# Altium PCB ALU_Shifter.PcbDoc
Units mil, origin at the board's own origin, x right, y up, seen from the top; angles counter-clockwise.
Board outline 3500 x 2500 mil, 2 copper layers (Top Layer, Bottom Layer); 17 components, 106 nets, 284 pads, 0 vias.
Unrouted connection lines stored in the file: 163.
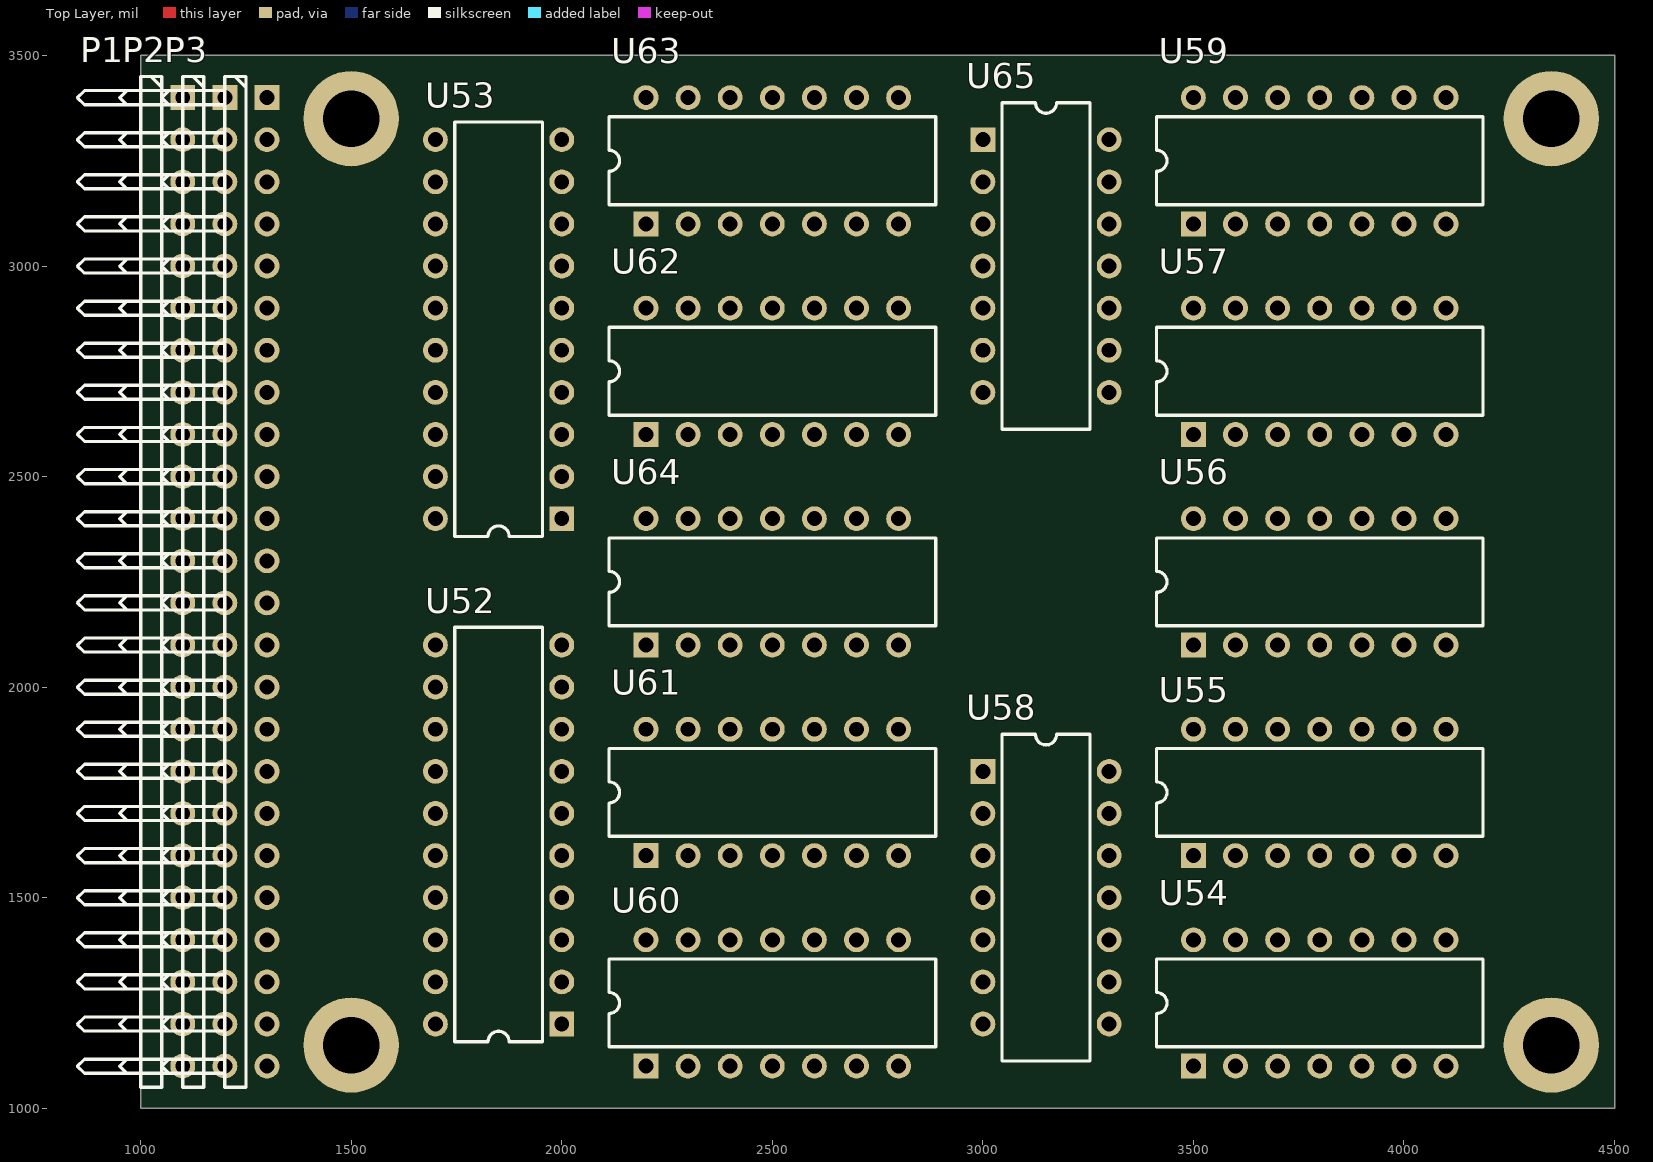
[diagram p0: Top Layer view]
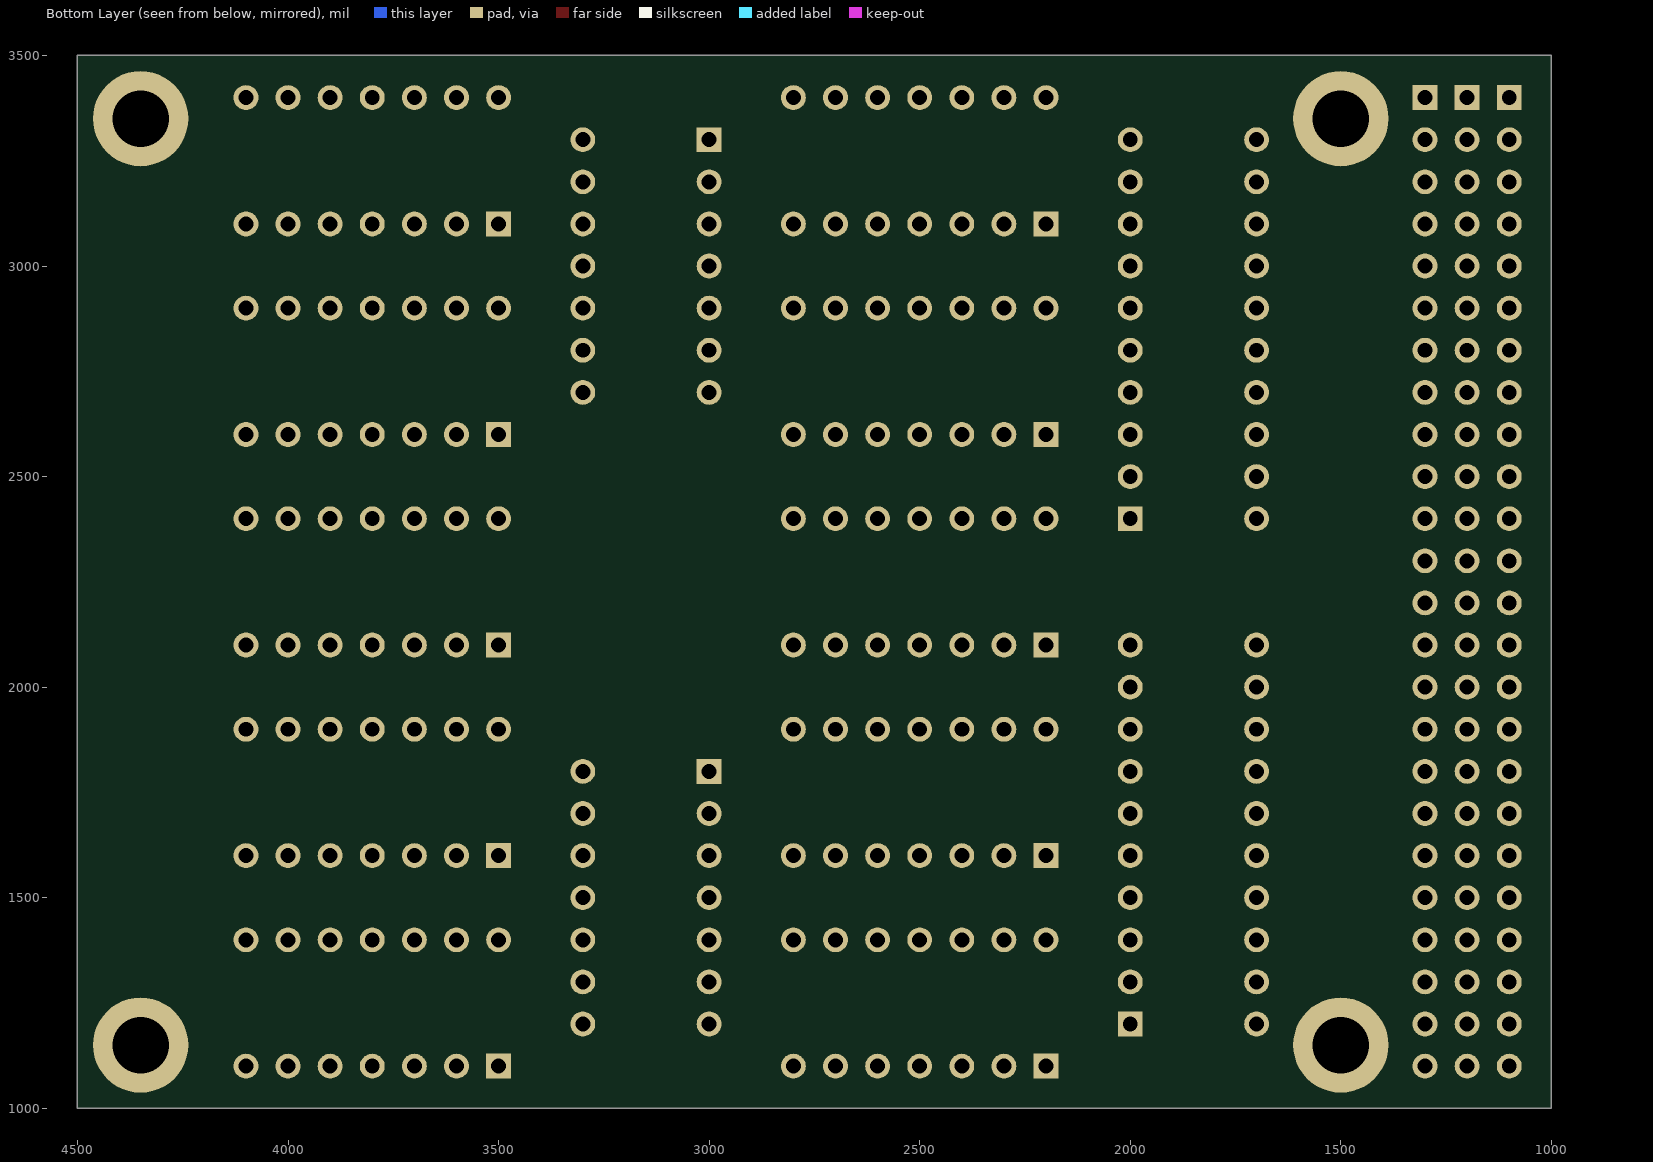
[diagram p1: Bottom Layer view, seen from below]

## Layer stack, top to bottom
Top Solder: solder mask 0.4, Solder Resist, Dk 3.5
Top Layer: signal copper 1.4
Dielectric 1: dielectric 12.6, FR-4, Dk 4.8
Bottom Layer: signal copper 1.4
Bottom Solder: solder mask 0.4, Solder Resist, Dk 3.5

## Board outline
1000,1000 4500,1000 4500,3500 1000,3500

## Design rules (kind name [scope] priority, off if disabled: settings)
Clearance [All] p1: gap=10 ignorepadtopadclearanceinfootprint=FALSE except(0: Arc-Hole Track-Hole SMDPad-Hole THPad-Hole Via-Hole Fill-Hole Poly-Hole Region-Hole Text-Hole)
PolygonConnect [All] p1: connectstyle=Relief reliefconductorwidth=10 reliefentries=4 polygonreliefangle="90 Angle" airgapwidth=10
RoutingVias [All] p1: holewidth=28 width=50 viastyle="Through Hole" minholewidth=28 minwidth=50 maxholewidth=28 maxwidth=50
SolderMaskExpansion [All] p1: expansion=4 istentingtop=FALSE
Width [All] p1: maxlimit=10 minlimit=10 preferedwidth=10
30 further rules are at their usual default settings.

## Classes and differential pairs
component class ALU_SHIFTER: U52 U53 U54 U55 U56 U57 U58 U59 U60 U61 U62 U63 U64 U65
component class Connectors: P1 P2 P3
net class OUT_[15..0]: OUT_0 OUT_1 OUT_2 OUT_3 OUT_4 OUT_5 OUT_6 OUT_7 OUT_8 OUT_9 OUT_10 OUT_11 OUT_12 OUT_13 OUT_14 OUT_15
net class B_[15..0]: B_0 B_1 B_2 B_3 B_4 B_5 B_6 B_7 B_8 B_9 B_10 B_11 B_12 B_13 B_14 B_15
net class A_[15..0]: A_0 A_1 A_2 A_3 A_4 A_5 A_6 A_7 A_8 A_9 A_10 A_11 A_12 A_13 A_14 A_15

## Components (designator, comment, footprint, x,y, rotation, side; value= is the part's Value field where it differs from the comment)
P1 "Header 24H" HDR1X24H 1100,3400 r270 top
P2 "Header 24H" HDR1X24H 1200,3400 r270 top
P3 "Header 24H" HDR1X24H 1300,3400 r270 top
U52 "SN74LS245N" N020 1850,1650 r90 top
U53 "SN74LS245N" N020 1850,2850 r90 top
U54 "SN74LS08N" N014 3800,1250 r0 top
U55 "SN74LS08N" N014 3800,1750 r0 top
U56 "SN74LS08N" N014 3800,2250 r0 top
U57 "SN74LS08N" N014 3800,2750 r0 top
U58 "SN74LS32N" N014 3150,1500 r270 top
U59 "SN74LS32N" N014 3800,3250 r0 top
U60 "SN74LS08N" N014 2500,1250 r0 top
U61 "SN74LS08N" N014 2500,1750 r0 top
U62 "SN74LS08N" N014 2500,2750 r0 top
U63 "SN74LS08N" N014 2500,3250 r0 top
U64 "SN74LS32N" N014 2500,2250 r0 top
U65 "SN74LS32N" N014 3150,3000 r270 top

## Footprints (in the part's own frame and the unit in brackets; to place one, negate y for a bottom-side part, rotate by r counter-clockwise, add the part's x,y. Pads: shape width x height; smd on the part's side, far side on the other; paste and mask are expansions set on the pad)
HDR1X24H [mm] "Connector; Header; 24 Position; Right Angle"
  rect 1.5x1.5 hole 0.9: 1(0,0)
  round 1.5 hole 0.9: 2(2.54,0) 3(5.08,0) 4(7.62,0) 5(10.16,0) 6(12.7,0) 7(15.24,0) 8(17.78,0) 9(20.32,0) 10(22.86,0) 11(25.4,0) 12(27.94,0) 13(30.48,0) 14(33.02,0) 15(35.56,0) 16(38.1,0) 17(40.64,0) 18(43.18,0) 19(45.72,0) 20(48.26,0) 21(50.8,0) 22(53.34,0) 23(55.88,0) 24(58.42,0)
  silkscreen extent -1.27,-6.35 59.69,-1.27
N014 [mm] "DIP; 14 Leads; Row Spacing 7.62 mm; Pitch 2.54 mm"
  rect 1.5x1.5 hole 0.9: 1(-7.62,-3.81)
  round 1.5 hole 0.9: 2(-5.08,-3.81) 3(-2.54,-3.81) 4(0,-3.81) 5(2.54,-3.81) 6(5.08,-3.81) 7(7.62,-3.81) 8(7.62,3.81) 9(5.08,3.81) 10(2.54,3.81) 11(0,3.81) 12(-2.54,3.81) 13(-5.08,3.81) 14(-7.62,3.81)
  silkscreen extent -9.85,-2.65 9.85,2.65, body extent -9.15,-5.08 9.15,5.12, height 7.88
N020 [mm] "DIP; 20 Leads; Row Spacing 7.62 mm; Pitch 2.54 mm"
  rect 1.5x1.5 hole 0.9: 1(-11.43,-3.81)
  round 1.5 hole 0.9: 2(-8.89,-3.81) 3(-6.35,-3.81) 4(-3.81,-3.81) 5(-1.27,-3.81) 6(1.27,-3.81) 7(3.81,-3.81) 8(6.35,-3.81) 9(8.89,-3.81) 10(11.43,-3.81) 11(11.43,3.81) 12(8.89,3.81) 13(6.35,3.81) 14(3.81,3.81) 15(1.27,3.81) 16(-1.27,3.81) 17(-3.81,3.81) 18(-6.35,3.81) 19(-8.89,3.81) 20(-11.43,3.81)
  silkscreen extent -12.5,-2.65 12.5,2.65, body extent -13.08,-5.08 13.08,5.12, height 7.88

## Part data
P1 P2 P3: "Header, 24-Pin, Right Angle", LatestRevisionDate=17-Jul-2002, LatestRevisionNote="Re-released for DXP Platform.", Publisher="Altium Limited"
U52 U53: "Octal Bus Transceiver with 3-State Outputs", ComponentLink1Description="Manufacturer Link", ComponentLink1URL=http://www.ti.com/, ComponentLink2Description=Datasheet, ComponentLink2URL=http://www-s.ti.com/sc/ds/sn74ls245.pdf, DatasheetVersion=Mar-1988, LatestRevisionDate=04-Mar-2005, LatestRevisionNote="Stylized 3D Model Added.", PackageDescription="DIP; 20 Leads; Row Spacing 7.62 mm; Pitch 2.54 mm", PackageReference=N020, PackageVersion=Oct-1995, Published=8-Jun-2000, Publisher="Altium Limited"
U54 U55 U56 U57 U60 U61 U62 U63: "Quadruple 2-Input Positive-AND Gate", ComponentLink1Description="Manufacturer Link", ComponentLink1URL=http://www.ti.com/, ComponentLink2Description=Datasheet, ComponentLink2URL=http://www-s.ti.com/sc/ds/SN74LS08.pdf, DatasheetVersion=Mar-1988, LatestRevisionDate=04-Mar-2005, LatestRevisionNote="Stylized 3D Model Added.", PackageDescription="DIP; 14 Leads; Row Spacing 7.62 mm; Pitch 2.54 mm", PackageReference=N014, PackageVersion=Oct-1995, Published=8-Jun-2000, Publisher="Altium Limited"
U58 U59 U64 U65: "Quadruple 2-Input Positive-OR Gate", ComponentLink1Description="Manufacturer Link", ComponentLink1URL=http://www.ti.com/, ComponentLink2Description=Datasheet, ComponentLink2URL=http://www-s.ti.com/sc/ds/sn74ls32.pdf, DatasheetVersion=Mar-1988, LatestRevisionDate=04-Mar-2005, LatestRevisionNote="Stylized 3D Model Added.", PackageDescription="DIP; 14 Leads; Row Spacing 7.62 mm; Pitch 2.54 mm", PackageReference=N014, PackageVersion=Oct-1995, Published=8-Jun-2000, Publisher="Altium Limited"

## Free pads (board coordinates)
  round 226.38 hole 133.86: ""(1500,1150) ""(1500,3350) ""(4350,1150) ""(4350,3350)

## Nets (pads, with @x,y where several pads share a name; then routed paths per layer and width w, separated by ;. In a path a pad name is that pad's centre, name@x,y a point inside that pad or via, vN(x,y) a via of type N, cw(c..) or ccw(c..) an arc to the next point about the centre after c; other vN are vias at no path point)
A0_RS: U54.3 U65.9
A7_LS: U57.11 U59.12
A8_RS: U59.10 U60.3
A15_LS: U63.11 U65.10
A\D\D\_\O\U\T\: P1.2
A\N\D\_\O\U\T\: P1.4
A_0: P1.23 U54.2 U54.4
A_1: P1.22 U54.10 U54.12
A_2: P1.21 U55.2 U55.4
A_3: P1.20 U55.10 U55.12
A_4: P1.19 U56.2 U56.4
A_5: P1.18 U56.10 U56.12
A_6: P1.17 U57.2 U57.4
A_7: P1.16 U57.10 U57.12
A_8: P1.15 U60.2 U60.4
A_9: P1.14 U60.10 U60.12
A_10: P1.13 U61.2 U61.4
A_11: P1.12 U61.10 U61.12
A_12: P1.11 U62.2 U62.4
A_13: P1.10 U62.10 U62.12
A_14: P1.9 U63.2 U63.4
A_15: P1.8 U63.10 U63.12
B_0: P2.23
B_1: P2.22
B_2: P2.21
B_3: P2.20
B_4: P2.19
B_5: P2.18
B_6: P2.17
B_7: P2.16
B_8: P2.15
B_9: P2.14
B_10: P2.13
B_11: P2.12
B_12: P2.11
B_13: P2.10
B_14: P2.9
B_15: P2.8
CO: P3.2 U65.8
GND: P1.24 P2.24 P3.24 U52.10 U53.10 U54.7 U55.7 U56.7 U57.7 U58.7 U59.7 U60.7 U61.7 U62.7 U63.7 U64.7 U65.7
LEFT: P2.2 U54.5 U54.13 U55.5 U55.13 U56.5 U56.13 U57.5 U57.13 U60.5 U60.13 U61.5 U61.13 U62.5 U62.13 U63.5 U63.13
NetU54_6: U54.6 U58.1
NetU54_11: U54.11 U58.4
NetU55_3: U55.3 U58.2
NetU55_6: U55.6 U58.9
NetU55_8: U55.8 U58.5
NetU55_11: U55.11 U58.12
NetU56_3: U56.3 U58.10
NetU56_6: U56.6 U59.1
NetU56_8: U56.8 U58.13
NetU56_11: U56.11 U59.4
NetU57_3: U57.3 U59.2
NetU57_6: U57.6 U59.9
NetU57_8: U57.8 U59.5
NetU59_13: U59.13 U60.8
NetU60_6: U60.6 U64.1
NetU60_11: U60.11 U64.4
NetU61_3: U61.3 U64.2
NetU61_6: U61.6 U64.9
NetU61_8: U61.8 U64.5
NetU61_11: U61.11 U64.12
NetU62_3: U62.3 U64.10
NetU62_6: U62.6 U65.1
NetU62_8: U62.8 U64.13
NetU62_11: U62.11 U65.4
NetU63_3: U63.3 U65.2
NetU63_8: U63.8 U65.5
O\R\_\O\U\T\: P1.5
O\U\T\: P1.7 U52.19 U53.19
OUT_0: P3.23 U52.18
OUT_1: P3.22 U52.17
OUT_2: P3.21 U52.16
OUT_3: P3.20 U52.15
OUT_4: P3.19 U52.14
OUT_5: P3.18 U52.13
OUT_6: P3.17 U52.12
OUT_7: P3.16 U52.11
OUT_8: P3.15 U53.18
OUT_9: P3.14 U53.17
OUT_10: P3.13 U53.16
OUT_11: P3.12 U53.15
OUT_12: P3.11 U53.14
OUT_13: P3.10 U53.13
OUT_14: P3.9 U53.12
OUT_15: P3.8 U53.11
REG_0: U52.2 U54.8
REG_1: U52.3 U58.3
REG_2: U52.4 U58.6
REG_3: U52.5 U58.8
REG_4: U52.6 U58.11
REG_5: U52.7 U59.3
REG_6: U52.8 U59.6
REG_7: U52.9 U59.8
REG_8: U53.2 U59.11
REG_9: U53.3 U64.3
REG_10: U53.4 U64.6
REG_11: U53.5 U64.8
REG_12: U53.6 U64.11
REG_13: U53.7 U65.3
REG_14: U53.8 U65.6
REG_15: U53.9 U63.6
RIGHT: P2.3 U54.1 U54.9 U55.1 U55.9 U56.1 U56.9 U57.1 U57.9 U60.1 U60.9 U61.1 U61.9 U62.1 U62.9 U63.1 U63.9
SUB: P1.3
VCC: P1.1 P2.1 P3.1 U52.1 U52.20 U53.1 U53.20 U54.14 U55.14 U56.14 U57.14 U58.14 U59.14 U60.14 U61.14 U62.14 U63.14 U64.14 U65.14
X\O\R\_\O\U\T\: P1.6
Z\F\: P3.3
pads on no net: P2.4 P2.5 P2.6 P2.7 P3.4 P3.5 P3.6 P3.7 U65.11 U65.12 U65.13